# Altium PCB ESP32.PcbDoc
Units mil, origin at the board's own origin, x right, y up, seen from the top; angles counter-clockwise.
Board outline 780 x 1225 mil, 2 copper layers (Top Layer, Bottom Layer); 7 components, 9 nets, 33 pads, 0 vias.
Unrouted connection lines stored in the file: 10.
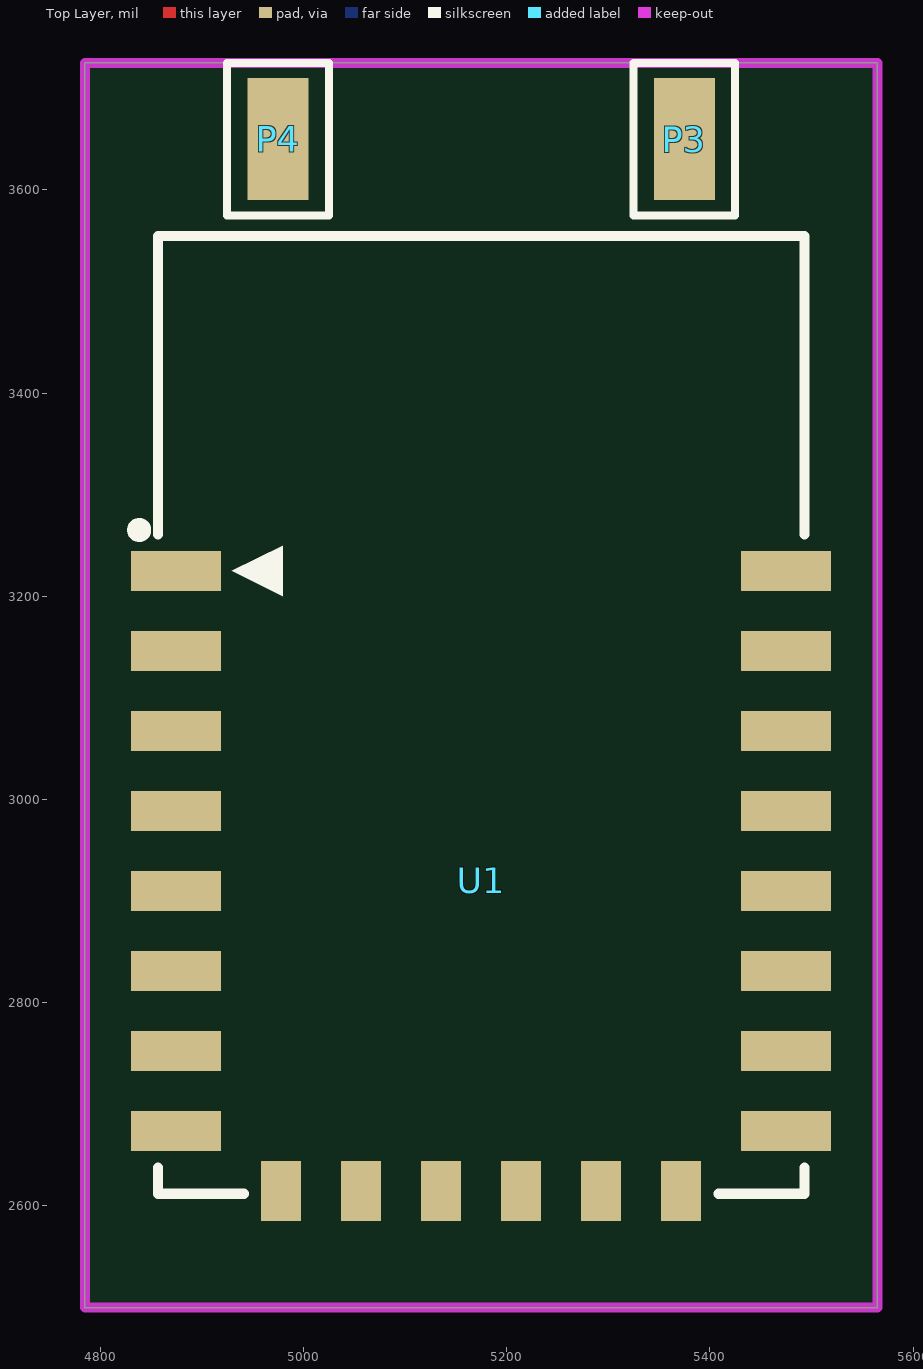
[diagram p0: Top Layer view]
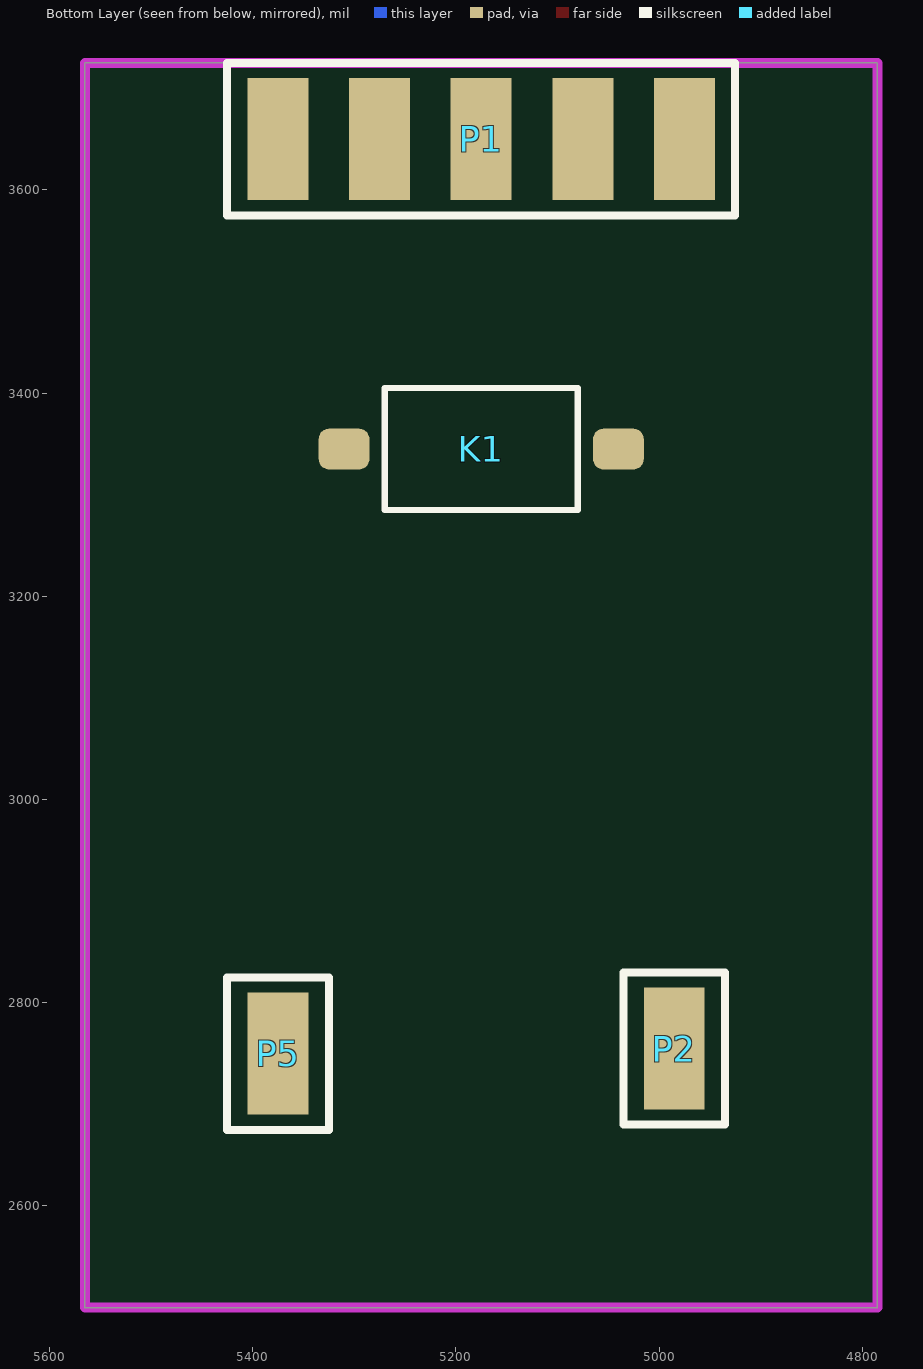
[diagram p1: Bottom Layer view, seen from below]

## Layer stack, top to bottom
Top Solder: solder mask 0.4, Solder Resist, Dk 3.5
Top Layer: signal copper 1.4
Dielectric 1: dielectric 12.6, FR-4, Dk 4.8
Bottom Layer: signal copper 1.4
Bottom Solder: solder mask 0.4, Solder Resist, Dk 3.5

## Board outline
4785,2500 4785,3725 5565,3725 5565,2500

## Design rules (kind name [scope] priority, off if disabled: settings)
Clearance [All] p1: gap=10
PolygonConnect [All] p1: connectstyle=Relief reliefconductorwidth=10 reliefentries=4 polygonreliefangle="90 Angle" airgapwidth=10
RoutingVias [All] p1: holewidth=15 width=25 viastyle="Through Hole" minholewidth=10 minwidth=15 maxholewidth=50 maxwidth=60
SolderMaskExpansion [All] p1: expansion=4
Width [All] p1: maxlimit=50 minlimit=10 preferedwidth=15
30 further rules are at their usual default settings.

## Classes and differential pairs
component class ESP32: K1 P2 P3 P5 U1

## Components (designator, comment, footprint, x,y, rotation, side; value= is the part's Value field where it differs from the comment)
K1 "TACT 2P" ButtonTACT_3x6x2.5_180 5175,3345 r180 bottom
P1 "Header 5" HDR1X5_SOP 4975,3650 r0 bottom
P2 "Header 1" HDR1X1_SOP 4985,2755 r180 bottom
P3 "Header 1" HDR1X1_SOP 5375,3650 r0 top
P4 "Header 1" HDR1X1_SOP 4975,3650 r0 top
P5 "Header 1" HDR1X1_SOP 5375,2750 r180 bottom
U1 "ESP_12_E" ESP_12_E 4860,3225 r0 top

## Footprints (in the part's own frame and the unit in brackets; to place one, negate y for a bottom-side part, rotate by r counter-clockwise, add the part's x,y. Pads: shape width x height; smd on the part's side, far side on the other; paste and mask are expansions set on the pad)
ButtonTACT_3x6x2.5_180 [mil]
  rrect50% 50x40 smd: 1(-135,0) 2(135,0)
  silkscreen extent -95,-60 95,60, body extent -157,-71 157,71, height 94
ESP_12_E [mm] "ESP-12 Wi-Fi Module by AI-Thinker"
  rect 2.25x1 smd: 1(0.375,0) 2(0.375,-2) 3(0.375,-4) 4(0.375,-6) 5(0.375,-8) 6(0.375,-10) 7(0.375,-12) 8(0.375,-14) 15(15.625,-14) 16(15.625,-12) 17(15.625,-10) 18(15.625,-8) 19(15.625,-6) 20(15.625,-4) 21(15.625,-2) 22(15.625,0)
  rect 1x1.5 smd: 9(3,-15.5) 10(5,-15.5) 11(7,-15.5) 12(9,-15.5) 13(11,-15.5) 14(13,-15.5)
  silkscreen extent -0.7,-15.57 16.08,8.37, body extent 0,-15.49 16,8.51, height 2.75
HDR1X1_SOP [mil]
  rect 60x120 smd: 1(0,0)
  silkscreen extent -50,-75 50,75
HDR1X5_SOP [mil]
  rect 60x120 smd: 1(0,0) 2(100,0) 3(200,0) 4(300,0) 5(400,0)
  silkscreen extent -50,-75 450,75

## Part data
K1: library part ButtonTACT_3x6x2.5_180, "Button"
P1: "Header, 5-Pin"
P2 P3 P4 P5: "Header, 1-Pin"
U1: "ESP-12 Wi-Fi Module by AI-Thinker"

## Nets (pads, with @x,y where several pads share a name; then routed paths per layer and width w, separated by ;. In a path a pad name is that pad's centre, name@x,y a point inside that pad or via, vN(x,y) a via of type N, cw(c..) or ccw(c..) an arc to the next point about the centre after c; other vN are vias at no path point)
BITOUT: P1.2
BITSCLK: P1.3 U1.5
CS: P1.4 U1.16
DATAINPUT: P1.1 U1.7
GND: K1.2 P3.1 P5.1 U1.15
MISO: U1.6
NetK1_1: K1.1 U1.20
OUTENABLE: P1.5 U1.19
VCC: P2.1 P4.1 U1.8
pads on no net: U1.1 U1.2 U1.3 U1.4 U1.9 U1.10 U1.11 U1.12 U1.13 U1.14 U1.17 U1.18 U1.21 U1.22

## Keep-outs
Keep-Out Layer:
  lines w10: 4785,2500 5565,2500 5565,3725 5425,3725 4925,3725 4785,3725 4785,2500

## Text inside footprints (layer, text, board x,y; h text height)
U1: Mechanical 13 "CUTOUT POLYGON" at 4865,3515 h10; Mechanical 13 "ANTENNA AREA" at 4865,3535 h10